# EAGLE board Adafruit PyBadge (EAGLE 9.3.1)
REV: F
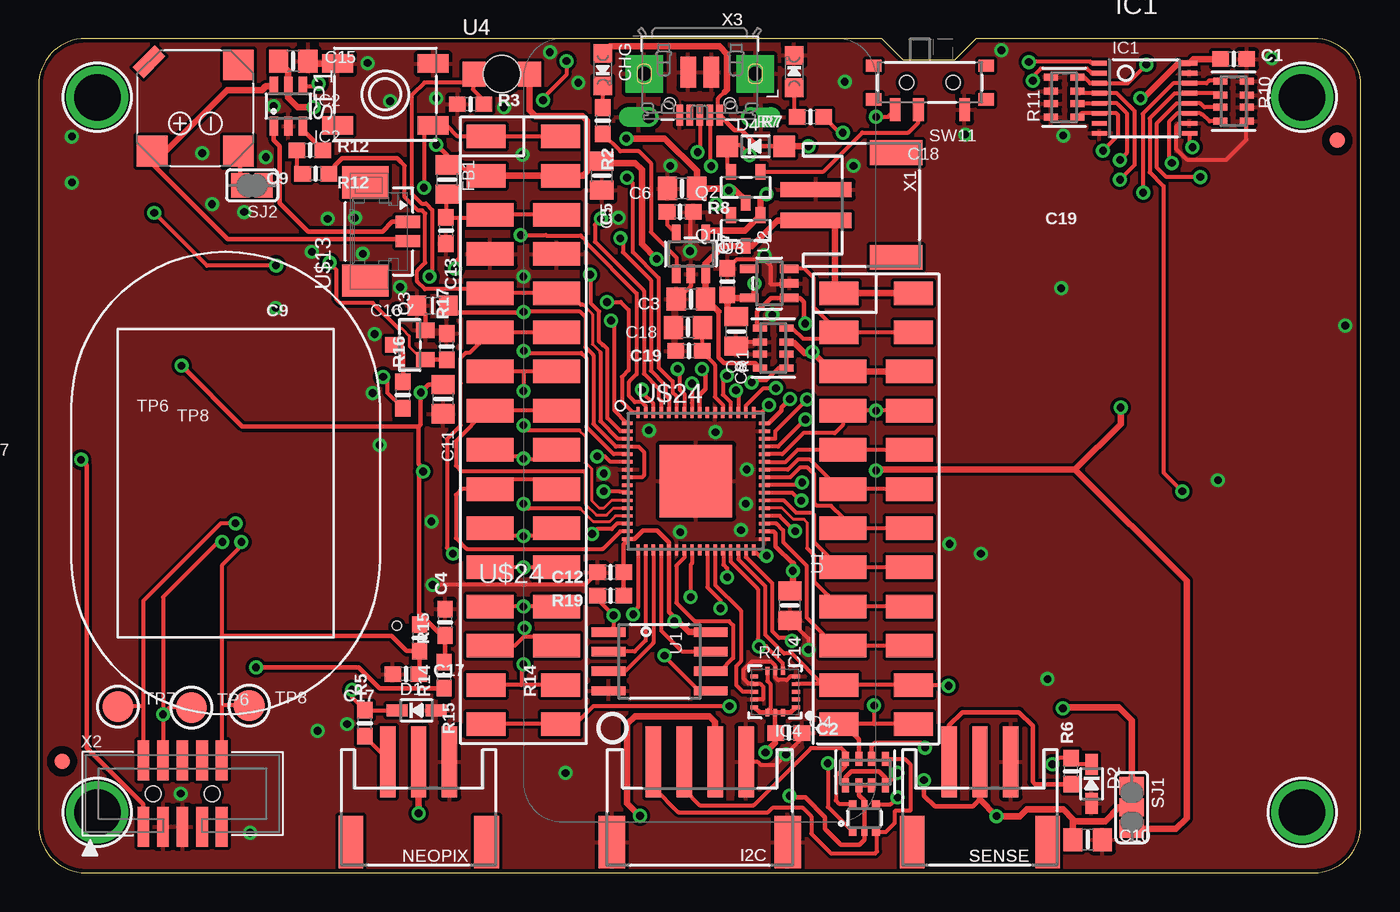
[diagram p0: board, top side]
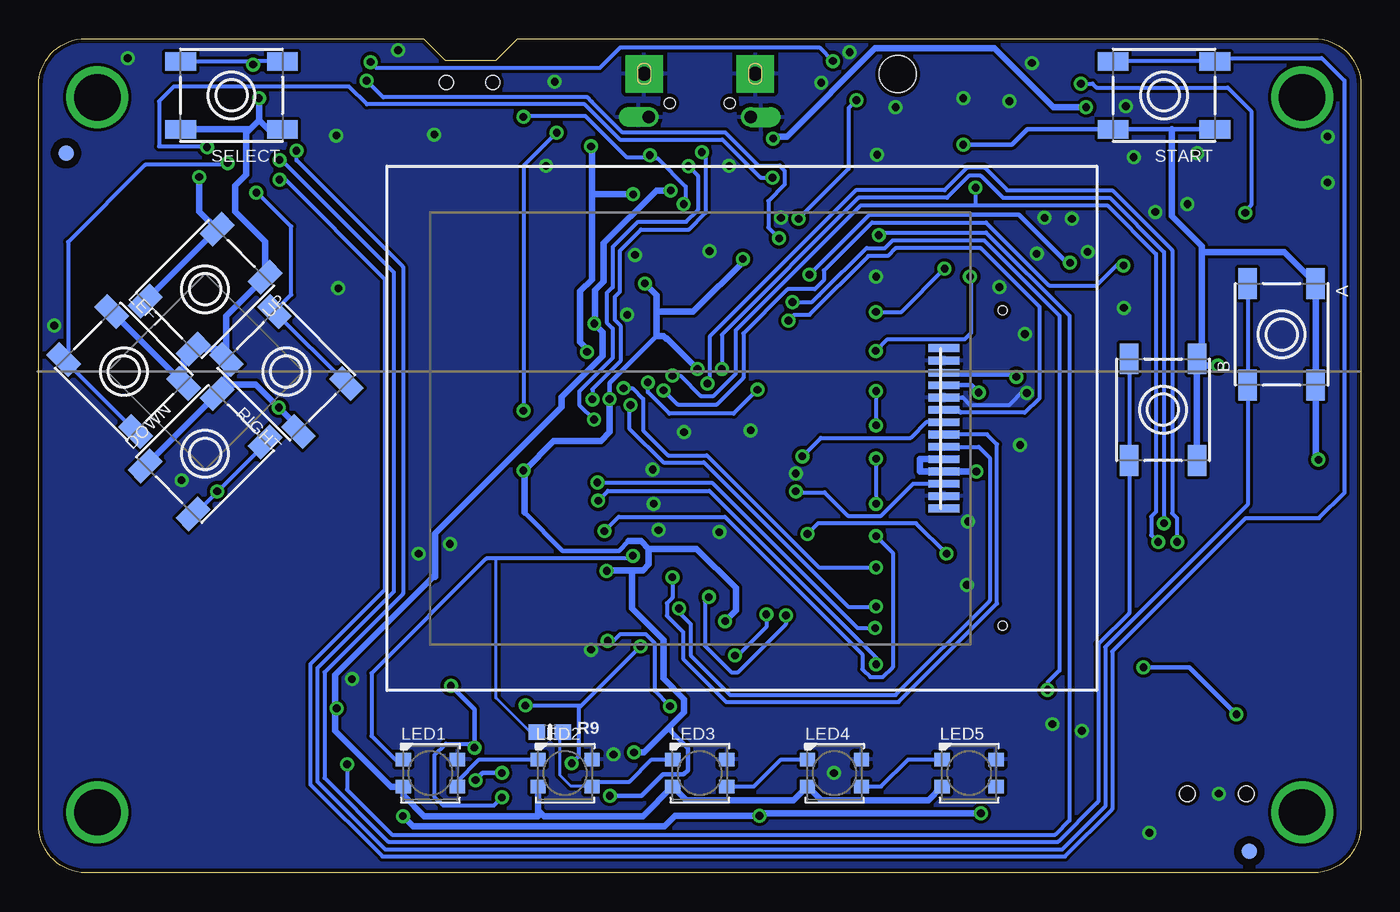
[diagram p1: board, bottom side, seen from below]

Size 85.72 x 54.1 mm. Coordinates in mm from the lower left corner, seen from the top.
Outline: 0,51.05 0,3.17 arc90 3.05,0 82.68,0 arc90 85.72,3.17 85.72,51.05 arc90 82.68,54.1 60.77,54.1 59.37,52.71 56.07,52.71 54.67,54.1 3.05,54.1 arc90 0,51.05
Copper layers (1*16): Top 0.035mm / dielectric 1.5mm / Bottom 0.035mm
Design rules "adafruit *": minimum track width 8mil, minimum drill 19mil, track to track 8mil, track to pad 8mil, pad to pad 8mil, via to via 8mil, smd to smd 8mil, copper to edge 10mil, drill to drill 8mil, minimum pad ring 10mil, minimum via ring 8mil, stop-mask expansion 2mil, vias tented up to drill 20mil, thermal gap 10mil
Net classes: 1 power: width 0.305 mm; 2 gnd: width 0.254 mm

## Footprints (pad centres in the part's own frame; a part is rotated, then mirrored left to right if it is on the bottom)
6MM_SMT = smd 2 x 1.2: A -3.3,-2.2; A' 3.3,-2.2; B -3.3,2.2; B' 3.3,2.2
0603-NO = smd 1.075 x 1: 1 -0.85,0; 2 0.85,0
0805-NO = smd 1.24 x 1.5: 1 -0.95,0; 2 0.95,0
_0805MP = smd 1.2 x 1.3: 1 -1.016,0; 2 1.016,0
CHIPLED_0805_NOOUTLINE = smd 1.2 x 1.2: A 0,-1.05; C 0,1.05
SOD-323 = smd 1.35 x 0.8: A 1.27,0; C -1.27,0
SOD-123 = smd 1.4 x 1.4: A 1.85,0; C -1.85,0
JSTPH4 = smd 1 x 4.6: 1 -3,-3.7; 2 -1,-3.7; 3 1,-3.7; 4 3,-3.7 | smd 1.7 x 3.4: NC1 -5.7,1.5; NC2 5.7,1.5
TSSOP16 = smd 0.305 x 0.991: 1 -2.275,-2.918; 2 -1.625,-2.918; 3 -0.975,-2.918; 4 -0.325,-2.918; 5 0.325,-2.918; 6 0.975,-2.918; 7 1.625,-2.918; 8 2.275,-2.918; 9 2.275,2.918; 10 1.625,2.918; 11 0.975,2.918; 12 0.325,2.918; 13 -0.325,2.918; 14 -0.975,2.918; 15 -1.625,2.918; 16 -2.275,2.918
SOT23-6 = smd 0.55 x 1.2: 1 -0.95,-1.3; 2 0,-1.3; 3 0.95,-1.3; 4 0.95,1.3; 5 0,1.3; 6 -0.95,1.3
LGA16_3X3MM = smd 0.5 x 0.25: 1 -1.35,1; 2 -1.35,0.5; 3 -1.35,0; 4 -1.35,-0.5; 5 -1.35,-1; 9 1.35,-1; 10 1.35,-0.5; 11 1.35,0; 12 1.35,0.5; 13 1.35,1 | smd 0.25 x 0.5: 6 -0.5,-1.35; 7 0,-1.35; 8 0.5,-1.35; 14 0.5,1.35; 15 0,1.35; 16 -0.5,1.35
JD-T1800 = smd 0.5 x 2: 1 5.2,-13.1; 2 4.4,-13.1; 3 3.6,-13.1; 4 2.8,-13.1; 5 2,-13.1; 6 1.2,-13.1; 7 0.4,-13.1; 8 -0.4,-13.1; 9 -1.2,-13.1; 10 -2,-13.1; 11 -2.8,-13.1; 12 -3.6,-13.1; 13 -4.4,-13.1; 14 -5.2,-13.1 | hole 0.6: -12.8,-16.9; 7.65,-16.9
LED3535 = smd 1 x 0.85: 1 -1.75,0.875; 2 -1.75,-0.875; 3 1.75,-0.875; 4 1.75,0.875
FEATHERWING_SMT_NOHOLES = smd 1.524 x 2.54: 1 6.35,2.413; 1B 6.35,-2.413; 2 8.89,2.413; 2B 8.89,-2.413; 15 41.91,2.413; 15B 41.91,-2.413; 16 44.45,2.413; 16B 44.45,-2.413; 17 44.45,20.447; 17B 44.45,25.273; 18 41.91,20.447; 18B 41.91,25.273; 27 19.05,20.447; 27B 19.05,25.273; 28 16.51,20.447; 28B 16.51,25.273 | smd 1.524 x 3.048: 3 11.43,2.159; 3B 11.43,-2.159; 4 13.97,2.159; 4B 13.97,-2.159; 5 16.51,2.159; 5B 16.51,-2.159; 6 19.05,2.159; 6B 19.05,-2.159; 7 21.59,2.159; 7B 21.59,-2.159; 8 24.13,2.159; 8B 24.13,-2.159; 9 26.67,2.159; 9B 26.67,-2.159; 10 29.21,2.159; 10B 29.21,-2.159; 11 31.75,2.159; 11B 31.75,-2.159; 12 34.29,2.159; 12B 34.29,-2.159; 13 36.83,2.159; 13B 36.83,-2.159; 14 39.37,2.159; 14B 39.37,-2.159; 19 39.37,20.701; 19B 39.37,25.019; 20 36.83,20.701; 20B 36.83,25.019; 21 34.29,20.701; 21B 34.29,25.019; 22 31.75,20.701; 22B 31.75,25.019; 23 29.21,20.701; 23B 29.21,25.019; 24 26.67,20.701; 24B 26.67,25.019; 25 24.13,20.701; 25B 24.13,25.019; 26 21.59,20.701; 26B 21.59,25.019
JSTPH3 = smd 1 x 4.6: 1 -2,-2.7; 2 0,-2.7; 3 2,-2.7 | smd 1.6 x 3.4: NC1 -4.4,2.5; NC2 4.4,2.5
SOT23-R = smd 0.635 x 1.016: 1 -0.95,-1; 2 0.95,-1; 3 0,1
SOT23-WIDE = smd 1 x 1.2: 1 -0.95,-1; 2 0.95,-1; 3 0,1
SOT363 = smd 0.5 x 0.5: 1 -0.75,-0.9; 3 0.75,-0.9; 4 0.75,0.9; 6 -0.75,0.9 | smd 0.4 x 0.5: 2 0,-0.9; 5 0,0.9
RESPACK_4X0603 = smd 0.45 x 0.9: 1 -1.3,-0.85; 2 -0.4,-0.85; 3 0.4,-0.85; 4 1.3,-0.85; 5 1.3,0.85; 6 0.4,0.85; 7 -0.4,0.85; 8 -1.3,0.85
SOLDERJUMPER_2WAY_OPEN_NOPASTE = smd 1.168 x 1.6: 1 -1.397,0; 2 0,0; 3 1.397,0
SOLDERJUMPER_CLOSEDWIRE = smd 1.168 x 1.6: 1 -0.762,0; 2 0.762,0 | smd 0.635 x 0.203: WIRE 0,0
BUZZER_SMT_7.5MM = smd 2 x 2: + 2.8,-2.8; - 2.8,2.8; MT2 -2.8,2.8 | smd 2 x 1 rotated 135: MT -3,-3
EVQ-Q2_SMALLER = smd 2 x 1.2: A -3.1,-2; A' 3.1,-2; B -3.1,2; B' 3.1,2
SPDT_SMT_SSSS811101 = smd 0.7 x 1.5: A -2.25,1.75; B 0.75,1.75; C 2.25,1.75 | smd 1 x 0.8: SUP1 -3.65,1.1; SUP2 -3.65,-1.1; SUP3 3.65,1.1; SUP4 3.65,-1.1 | hole 0.9: -1.5,0; 1.5,0
TESTPOINT_ROUND_2MM = smd 2 x 2: P$1 0,0
SOIC8_208MIL = smd 0.6 x 2.2: 1 -1.905,-3.315; 2 -0.635,-3.315; 3 0.635,-3.315; 4 1.905,-3.315; 5 1.905,3.315; 6 0.635,3.315; 7 -0.635,3.315; 8 -1.905,3.315
SOT23-5 = smd 0.55 x 1.2: 1 -0.95,-1.3; 2 0,-1.3; 3 0.95,-1.3; 4 0.95,1.3; 5 -0.95,1.3
ALS-PT26-21C = smd 1.5 x 1.6: 1_E -1.8,0; 2_C 1.8,0 | hole 2.4: 0,0
MOUNTINGHOLE_3.0_PLATEDTHIN = drill 3 pad 3.6: P$1 0,0
53398-0271 = smd 0.8 x 1.6: 1 0.625,-1.27; 2 -0.625,-1.27 | smd 2.1 x 3: M1 3.185,1.48; M2 -3.185,1.48
PQFN64-1 = smd 0.7 x 0.22: 1 -4.45,3.75; 2 -4.45,3.25; 3 -4.45,2.75; 4 -4.45,2.25; 5 -4.45,1.75; 6 -4.45,1.25; 7 -4.45,0.75; 8 -4.45,0.25; 9 -4.45,-0.25; 10 -4.45,-0.75; 11 -4.45,-1.25; 12 -4.45,-1.75; 13 -4.45,-2.25; 14 -4.45,-2.75; 15 -4.45,-3.25; 16 -4.45,-3.75; 33 4.45,-3.75; 34 4.45,-3.25; 35 4.45,-2.75; 36 4.45,-2.25; 37 4.45,-1.75; 38 4.45,-1.25; 39 4.45,-0.75; 40 4.45,-0.25; 41 4.45,0.25; 42 4.45,0.75; 43 4.45,1.25; 44 4.45,1.75; 45 4.45,2.25; 46 4.45,2.75; 47 4.45,3.25; 48 4.45,3.75 | smd 0.22 x 0.7: 17 -3.75,-4.45; 18 -3.25,-4.45; 19 -2.75,-4.45; 20 -2.25,-4.45; 21 -1.75,-4.45; 22 -1.25,-4.45; 23 -0.75,-4.45; 24 -0.25,-4.45; 25 0.25,-4.45; 26 0.75,-4.45; 27 1.25,-4.45; 28 1.75,-4.45; 29 2.25,-4.45; 30 2.75,-4.45; 31 3.25,-4.45; 32 3.75,-4.45; 49 3.75,4.45; 50 3.25,4.45; 51 2.75,4.45; 52 2.25,4.45; 53 1.75,4.45; 54 1.25,4.45; 55 0.75,4.45; 56 0.25,4.45; 57 -0.25,4.45; 58 -0.75,4.45; 59 -1.25,4.45; 60 -1.75,4.45; 61 -2.25,4.45; 62 -2.75,4.45; 63 -3.25,4.45; 64 -3.75,4.45 | smd 4.7 x 4.7: EXP 0,0
FIDUCIAL_1MM = smd 1 x 1: 1 0,0
JSTPH2 = smd 1 x 4.6: 1 -1,-3.7; 2 1,-3.7 | smd 1.6 x 3.4: NC1 -3.4,1.5; NC2 3.4,1.5
2X05_1.27MM_BOX_POSTS = smd 0.76 x 2.6: 1 -2.54,-2.15; 2 -2.54,2.15; 3 -1.27,-2.15; 4 -1.27,2.15; 5 0,-2.15; 6 0,2.15; 7 1.27,-2.15; 8 1.27,2.15; 9 2.54,-2.15; 10 2.54,2.15 | hole 1: -1.905,0; 1.905,0
4UCONN_20329_V2 = smd 1 x 2: BASE@1 -0.75,-2; BASE@2 0.75,-2 | smd 0.4 x 1.35: D+ 0,0.775; D- -0.65,0.775; GND 1.3,0.775; ID 0.65,0.775; VBUS -1.3,0.775 | drill 0.8 pad 1.143 offset: SPRT@1 -3.3,0.9; SPRT@2 3.3,0.9 | drill 0.9 pad 2.413 square: SPRT@3 -3.6,-1.9; SPRT@4 3.6,-1.9 | hole 0.7: -1.95,0; 1.95,0

## Placement (x,y rotation side)
A  [6MM_SMT]  5.14,34.93 270 bottom
B  [6MM_SMT]  12.83,30.04 270 bottom
C1  1uF  [0603-NO]  77.47,52.77 0 top
C2  1uF  [0603-NO]  48.64,9.08 0 top
C3  10µF  [0805-NO]  42.29,37.21 180 top
C4  1uF  [0603-NO]  26.35,16.26 90 top
C5  10uF  [0805-NO]  36.51,45.21 270 top
C6  10µF  [0805-NO]  41.72,44.39 180 top
C7  1uF  [0603-NO]  44.66,38.34 90 top
C8  10µF  [0805-NO]  45.23,35.12 270 top
C9  0.1uF  [0603-NO]  17.97,45.34 180 top
C10  10uF  [0805-NO]  68.01,2.16 0 top
C11  10uF  [0805-NO]  26.23,30.72 270 top
C12  1uF  [0603-NO]  37.08,19.49 180 top
C13  1uF  [0603-NO]  26.42,41.66 270 top
C14  10uF  [0805-NO]  48.7,17.34 270 top
C15  10uF  [0805-NO]  16.51,52.64 0 top
C16  10µF  [_0805MP]  25.55,36.78 180 top
C17  0.1uF  [0603-NO]  23.81,12.89 0 top
C18  10uF  [0805-NO]  42.1,35.37 180 top
C19  1uF  [0603-NO]  42.16,33.85 180 top
CHG  ORANGE  [CHIPLED_0805_NOOUTLINE]  36.58,52.07 180 top
D1  3.6V  [SOD-323]  24.51,10.54 0 top
D2  3.6V  [SOD-323]  68.26,5.78 270 top
D4  MBR0540  [SOD-123]  46.48,47.12 0 top
DOWN  [6MM_SMT]  74.93,27.18 45 bottom
FB1  Ferrite  [0805-NO]  26.48,44.96 270 top
I2C  JST PH 4  [JSTPH4]  42.86,3.49 180 top
IC1  74165TSSOP  [TSSOP16]  71.69,50.23 270 top
IC2  PAM8301  [SOT23-6]  16.19,49.72 0 top
IC4  LIS3DH  [LGA16_3X3MM]  47.75,11.75 180 top
L  RED  [CHIPLED_0805_NOOUTLINE]  48.98,51.97 0 top
LCD1  DISP_LCD_JDT1800  [JD-T1800]  40.13,28.83 90 bottom
LED1  WS2812B3535  [LED3535]  60.33,6.48 0 bottom
LED2  WS2812B3535  [LED3535]  51.59,6.48 0 bottom
LED3  WS2812B3535  [LED3535]  42.86,6.48 0 bottom
LED4  WS2812B3535  [LED3535]  34.13,6.48 0 bottom
LED5  WS2812B3535  [LED3535]  25.4,6.48 0 bottom
LEFT  [6MM_SMT]  80.2,32.51 315 bottom
MS1  FEATHERWING_SMTDUALNOHOLES  [FEATHERWING_SMT_NOHOLES]  31.43,54.1 270 top
NEOPIX  JST PH 3  [JSTPH3]  24.64,4.51 180 top
Q1  DMG3405  [SOT23-R]  45.85,41.66 180 top
Q2  DMG3405  [SOT23-R]  45.85,44.45 180 top
Q3  BSS138  [SOT23-WIDE]  24.08,34.24 90 top
Q4  BSS138  [SOT363]  53.53,3.56 0 top
R1  100K  [RESPACK_4X0603]  47.62,34.04 90 top
R2  1K  [0603-NO]  36.58,48.77 270 top
R3  10K  [0603-NO]  28,49.85 0 top
R4  10K  [RESPACK_4X0603]  53.59,6.54 0 top
R5  1K  [0603-NO]  21.15,9.72 90 top
R6  1K  [0603-NO]  66.93,6.6 90 top
R7  2.2K  [0603-NO]  50.04,49.02 180 top
R8  4.7K  [0603-NO]  41.59,42.86 0 top
R9  DNP  [0603-NO]  52.58,9.14 0 bottom
R10  100K  [RESPACK_4X0603]  77.47,50.04 270 top
R11  100K  [RESPACK_4X0603]  66.48,50.29 90 top
R12  47K  [0603-NO]  17.59,46.86 0 top
R14  10K  [0603-NO]  24.7,15.24 270 top
R15  10K  [0603-NO]  26.29,12.83 270 top
R16  10  [0603-NO]  23.62,30.99 90 top
R17  100K  [0603-NO]  26.45,34.12 90 top
R19  100K  [0603-NO]  37.08,17.97 180 top
RIGHT  [6MM_SMT]  69.66,32.51 135 bottom
SELECT  [6MM_SMT]  73.22,50.42 180 bottom
SENSE  JST PH 3  [JSTPH3]  61.02,4.51 180 top
SJ1  [SOLDERJUMPER_2WAY_OPEN_NOPASTE]  70.87,4.25 270 top
SJ2  [SOLDERJUMPER_CLOSEDWIRE]  13.84,44.58 180 top
SP1  SPEAKER_7.5MM  [BUZZER_SMT_7.5MM]  10.16,49.59 270 top
START  [6MM_SMT]  12.76,50.42 180 bottom
SW1  SPST_TACT-EVQQ2  [EVQ-Q2_SMALLER]  22.48,50.48 0 top
SW11  [SPDT_SMT_SSSS811101]  57.78,51.24 180 top
TP6  [TESTPOINT_ROUND_2MM]  9.91,10.73 0 top
TP7  [TESTPOINT_ROUND_2MM]  5.14,10.79 0 top
TP8  [TESTPOINT_ROUND_2MM]  13.65,10.86 0 top
U1  GD25Q16  [SOIC8_208MIL]  40.26,13.72 270 top
U2  AP2112-3.3  [SOT23-5]  47.37,38.23 90 top
U3  MCP73831T-2ACI/OT  [SOT23-5]  42.29,40.13 0 top
U4  ALS-PT21  [ALS-PT26-21C]  30.03,51.8 0 top
U$5  MOUNTINGHOLE3.0THIN  [MOUNTINGHOLE_3.0_PLATEDTHIN]  3.81,50.29 0 top
U$6  MOUNTINGHOLE3.0THIN  [MOUNTINGHOLE_3.0_PLATEDTHIN]  81.92,50.29 0 top
U$8  [SPEAKER_OVAL8OHM]  12.13,25.27 90 top
U$13  CON_MOLEX_2P  [53398-0271]  22.67,41.59 90 top
U$15  MOUNTINGHOLE3.0THIN  [MOUNTINGHOLE_3.0_PLATEDTHIN]  3.81,3.94 0 top
U$17  MOUNTINGHOLE3.0THIN  [MOUNTINGHOLE_3.0_PLATEDTHIN]  81.92,3.94 0 top
U$18  [PYBADGE_TOP]  85.72,0.13 0 bottom
U$24  ATSAMD51J19  [PQFN64-1]  42.61,25.4 0 top
U$32  [PYBADGE_BOT]  0,0.13 0 top
U$34  FIDUCIAL_1MM  [FIDUCIAL_1MM]  1.52,7.24 270 top
U$35  FIDUCIAL_1MM  [FIDUCIAL_1MM]  84.18,47.51 270 top
U$37  [PCBFEAT-REV-040]  37.21,9.4 0 top
U$42  FIDUCIAL_1MM  [FIDUCIAL_1MM]  83.95,46.67 0 bottom
U$43  FIDUCIAL_1MM  [FIDUCIAL_1MM]  7.24,1.4 0 bottom
UP  [6MM_SMT]  74.93,37.85 225 bottom
X1  JSTPH  [JSTPH2]  54.1,43.31 270 top
X2  2x5 0.05" SWD  [2X05_1.27MM_BOX_POSTS]  9.33,5.14 0 top
X3  microUSB  [4UCONN_20329_V2]  42.86,49.91 180 top

## Library data of the parts
A B C1-C7 C9-C19 CHG D1 D2 D4 DOWN FB1 I2C IC1 IC2 IC4 L LCD1 LED1-LED5 LEFT MS1 NEOPIX Q1-Q4 R1-R12 R14-R17 R19 RIGHT SELECT SENSE SJ1 SJ2 SP1 START SW1 SW11 TP6-TP8 U1-U4 U$8 U$13 U$24 U$37 UP X1-X3 = microbuilder
C8 = microbuilder; COMPANY: ADAFRUIT INDUSTRIES; DRAWN: KTOWN; REV: A
U$5 U$6 U$15 U$17 U$34 U$35 U$42 U$43 = microbuilder; BOM: EXCLUDE
U$18 U$32 = feather_silks

## Nets
!RESET: C17.2 MS1.1 MS1.1B R14.2 SW1.A' TP8.P$1 U$24.52 X2.10
+3V3 [power]: A.B A.B' B.B B.B' C1.1 C2.1 C4.1 C5.1 C7.1 C8.1 C11.1 C12.1 C14.1 DOWN.B DOWN.B' FB1.1 IC1.16 IC4.1 IC4.8 IC4.13 IC4.14 IC4.15 IC4.16 LCD1.4 LCD1.10 LCD1.11 LEFT.B LEFT.B' MS1.2 MS1.2B Q4.2 Q4.5 R4.2 R4.3 R14.1 R15.1 R19.1 RIGHT.B RIGHT.B' SELECT.B SELECT.B' SJ1.3 START.B START.B' U1.8 U2.5 U4.2_C U$24.16 U$24.21 U$24.34 U$24.48 U$24.56 UP.B UP.B' X2.1
A0: C9.1 MS1.5 MS1.5B U$24.3
A1: MS1.6 MS1.6B U$24.14
A2: MS1.7 MS1.7B U$24.11
A3: MS1.8 MS1.8B U$24.12
A4: MS1.9 MS1.9B U$24.13
A5: MS1.10 MS1.10B U$24.15
A6_VMEAS: R1.1 R1.2 U$24.62
A7_LIGHT: R3.2 U4.1_E U$24.5
AVCC: C13.1 C16.1 FB1.2 MS1.3 MS1.3B U$24.4 U$24.8
BUTTON0: IC1.11 LEFT.A LEFT.A' R10.4
BUTTON1: IC1.12 R10.3 UP.A UP.A'
BUTTON2: DOWN.A DOWN.A' IC1.13 R10.2
BUTTON3: IC1.14 R10.1 RIGHT.A RIGHT.A'
BUTTON4: IC1.3 R11.4 SELECT.A SELECT.A'
BUTTON5: IC1.4 R11.3 START.A START.A'
BUTTON6: A.A A.A' IC1.5 R11.2
BUTTON7: B.A B.A' IC1.6 R11.1
BUTTON_CLK: IC1.2 U$24.60
BUTTON_LATCH: IC1.1 U$24.61
BUTTON_OUT: IC1.9 U$24.59
CHG_LED: R2.2 U3.1
CHG_RATE: R8.1 U3.5
D2_: NEOPIX.3 R5.1
D2_A8: D1.C R5.2 U$24.64
D3_: R6.1 SENSE.3
D3_A9: D2.C R6.2 U$24.63
D4: MS1.16 MS1.16B U$24.31
D5: MS1.19 MS1.19B U$24.35
D6: MS1.20 MS1.20B U$24.37
D7_LISIRQ: IC4.11 U$24.27
D8_NEOPIX: LED1.1 R9.1 U$24.32
D9: MS1.21 MS1.21B U$24.38
D10: MS1.22 MS1.22B U$24.41
D11: MS1.23 MS1.23B U$24.42
D12: MS1.24 MS1.24B U$24.43
D13: MS1.25 MS1.25B R7.1 U$24.44
D+: U$24.46 X3.D+
D-: U$24.45 X3.D-
EN: MS1.27 MS1.27B R1.4 U2.3
GND: C1.2 C2.2 C3.2 C4.2 C5.2 C6.2 C7.2 C8.2 C10.2 C11.2 C12.2 C13.2 C14.2 C15.2 C16.2 C17.1 C18.2 C19.2 D1.A D2.A I2C.1 I2C.NC1 I2C.NC2 IC1.8 IC1.10 IC1.15 IC2.2 IC4.5 IC4.7 IC4.10 IC4.12 L.C LCD1.2 LCD1.5 LCD1.13 LED1.4 LED2.4 LED3.4 LED4.4 LED5.4 MS1.4 MS1.4B NEOPIX.1 Q3.2 R1.6 R1.7 R3.1 R8.2 R10.5 R10.6 R10.7 R10.8 R11.5 R11.6 R11.7 R11.8 R17.2 SENSE.1 SW1.B SW1.B' SW11.A U1.4 U2.2 U3.2 U$24.7 U$24.22 U$24.33 U$24.47 U$24.54 U$24.EXP X1.1 X2.3 X2.5 X3.BASE@1 X3.BASE@2 X3.GND X3.SPRT@1 X3.SPRT@2 X3.SPRT@3 X3.SPRT@4
LEDK: LCD1.3 R16.1
MISO: MS1.13 MS1.13B U$24.49
MOSI: MS1.12 MS1.12B U$24.50
N$1: CHG.C R2.1
N$2: L.A R7.2
N$3: LED1.3 LED2.1
N$4: LED2.3 LED3.1 R9.2
N$5: LED3.3 LED4.1
N$6: Q3.3 R16.2
N$7: LED4.3 LED5.1
N$8: D4.C Q1.2 Q2.2 SW11.C
N$9: C9.2 R12.1
N$10: IC2.3 R12.2
N$12: SJ2.2 SP1.-
ON/OFF: Q2.1 SW11.B
QSPI_CS: R19.2 U1.1 U$24.24
QSPI_DATA[0]: U1.5 U$24.17
QSPI_DATA[1]: U1.2 U$24.18
QSPI_DATA[2]: U1.3 U$24.19
QSPI_DATA[3]: U1.7 U$24.20
QSPI_SCK: U1.6 U$24.23
RX: MS1.14 MS1.14B U$24.40
SCK: MS1.11 MS1.11B U$24.36
SCL: I2C.4 Q4.3 R4.5
SCL_3V: IC4.4 MS1.18 MS1.18B Q4.4 R4.6 U$24.30
SDA: I2C.3 Q4.6 R4.8
SDA_3V: IC4.6 MS1.17 MS1.17B Q4.1 R4.7 U$24.29
SPKR+: IC2.1 SJ2.1 U$13.1
SPKR-: IC2.6 SP1.+ U$13.2
SPKR_EN: IC2.4 U$24.51
SWCLK: R15.2 TP6.P$1 U$24.57 X2.4
SWDIO: TP7.P$1 U$24.58 X2.2
TFT_CS: LCD1.12 U$24.10
TFT_DC: LCD1.7 U$24.6
TFT_LITE: Q3.1 R17.1 U$24.2
TFT_MOSI: LCD1.8 U$24.28
TFT_RST: LCD1.6 U$24.1
TFT_SCK: LCD1.9 U$24.26
TX: MS1.15 MS1.15B U$24.39
V+ [power]: C6.1 C15.1 IC2.5 LED1.2 LED2.2 LED3.2 LED4.2 LED5.2 Q2.3 R1.5 SJ1.1 U2.1
VBAT [power]: C3.1 MS1.28 MS1.28B Q1.3 R1.8 U3.3 X1.2
VBUS: CHG.A D4.A MS1.26 MS1.26B Q1.1 R1.3 U3.4 X3.VBUS
VCC [power]: C10.1 I2C.2 NEOPIX.2 R4.1 R4.4 SENSE.2 SJ1.2
VDDCORE2: C18.1 C19.1 U$24.53

## Tracks (layer width: path | path; a pad name or v marks a point on that pad's centre or on a via)
!RESET  (via drill 0.5)
  Top 0.254: v44.62,32.24 44.37,31.99 44.37,31.01 44.86,30.52 U$24.52 | 11.87,10.86 11.87,15.37 11.87,19.93 13.14,21.2 v13.14,21.46 | TP8.P$1 11.87,10.86 | MS1.1 MS1.1B 27.18,47.75 26.45,48.48 SW1.A' 24.98,47.88 v24.98,44.43 | 11.87,10.86 X2.10
  Top 0.305: C17.2 24.7,12.93 R14.2 23.87,14.39 22.89,15.37 11.87,15.37
  Bottom 0.254: v44.62,32.24 44.12,32.24 42.8,30.92 41.96,30.92 40.53,32.35 40.53,35.16 32.4,43.29 25.02,43.29 | v13.14,21.46 13.59,21.91 13.59,23.11 13.28,23.42 13.28,40.13 16.45,43.29 25.02,43.29 | v24.98,44.43 24.98,43.33 25.02,43.29
+3V3  (via drill 0.5)
  Top 0.254: IC4.8 47.25,12.45 47.45,12.25 47.45,10.66
  Top 0.305: 41.4,16.38 41.34,16.45 | 41.34,16.45 40.86,16.93 U$24.21 40.86,21.43 40.09,22.21 39.18,22.21 38.64,21.67 38.18,21.67 U$24.16 38.16,21.52 37.93,21.3 C12.1 R19.1 | U$24.34 47.64,22.15 47.78,22.01 47.78,21.18 48.9,20.06 | IC4.15 IC4.14 47.18,10.4 | IC4.15 IC4.16 48.75,10.4 IC4.1 | IC4.13 46.75,10.4 47.18,10.4 | 41.34,16.45 v41.21,16.32 | IC4.15 47.75,9.04 | 47.75,9.04 47.75,8.45 | U$24.56 42.86,30.99 43.24,31.37 43.24,32.45 v43.02,32.67 | 47.45,10.66 47.18,10.4 | C2.1 47.75,9.04 | X2.1 6.79,4.44 3.11,8.13 3.11,26.44 v2.75,26.8 | R4.3 R4.2 53.19,5.04 53.53,4.71 Q4.5 Q4.2 53.53,2.16 53.21,1.84 52.01,1.84 50.99,2.86 50.99,3.62 49.72,4.89 48.83,4.89 48.72,5 v48.69,5 | R15.1 26.35,13.74 C4.1 26.12,15.41 25.07,16.46 | v48.7,30.73 48.16,30.19 48.16,30 47.31,29.15 U$24.48 | 25.07,16.46 24.66,16.87 24.66,25.76 v24.93,26.04 | v9.27,32.89 13.21,28.96 24.64,28.96 | 25.07,16.46 R14.1 | MS1.2B 28.07,45.21 27.37,45.91 FB1.1 26.48,46.53 v25.78,47.23 | 24.64,28.96 24.75,29.07 24.75,31.13 v24.78,31.15 25.3,31.67 C11.1 | 24.64,28.96 24.64,26.5 25.02,26.12
  Top 0.406: C8.1 44.66,36.64 C7.1 44.87,37.28 U2.5 46.42,37.28 v46.42,38.23 | MS1.2B MS1.2 35.31,45.21 35.56,45.47 35.56,46.16 | 41.4,16.38 42.16,15.62 U1.8 | 35.56,46.16 35.56,48.76 35.26,49.06 32.22,49.06 31.83,49.45 U4.2_C | 35.56,46.16 C5.1 36.64,46.04 38.67,46.04 39.12,45.59 39.12,40.77 v40.07,39.82 | v71.44,50.23 71.63,50.23 73.9,52.5 IC1.16 74.87,52.77 C1.1 | 47.75,8.45 v47.12,7.81 | v54.29,26.1 54.34,26.15 67.19,26.15 | 25.02,26.12 v24.93,26.04 | 67.19,26.15 70.15,29.11 v70.15,30.18 | C14.1 48.9,18.48 v48.9,19.58 v48.9,19.59 48.9,20.06 | SJ1.3 73.72,2.86 74.42,3.56 74.42,18.92 67.19,26.15
  Bottom 0.305: v48.7,30.73 48.7,31.75 45.66,34.8 | 54.23,23.37 51.75,20.89 48.11,20.89 47.47,21.53 | v48.69,5 46.65,5 45.26,6.38 43.91,6.38 43.62,6.67 43.62,8.06 44.93,9.37 | START.B 12.26,48.22 START.B' 21.63,48.22 22.62,47.23 v25.78,47.23 | LCD1.4 25.25,31.63 v24.78,31.15
  Bottom 0.406: v40.07,39.82 39.88,39.82 43.31,36.39 45.66,36.39 | 45.66,36.39 45.66,34.8 45.2,34.8 45.05,34.64 44.98,34.64 v43.02,32.67 | v46.42,38.23 45.66,37.47 45.66,36.39 | v47.12,7.81 46.48,7.81 44.93,9.37 43.88,10.42 43.88,11.26 45.22,12.61 45.22,15.11 47.24,17.14 47.24,19.63 | 54.23,26.1 52.32,28 49.28,28 48.7,28.57 v48.7,30.73 | v54.29,26.1 54.23,26.1 | 54.23,26.1 54.23,23.37 | LCD1.10 28.57,26.83 28.57,26.04 LCD1.11 v24.94,26.03 v24.93,26.04 | 47.24,19.63 46.54,19.63 46.17,20 46.17,21.02 | 46.17,21.02 43.06,21.02 40.51,18.48 40.51,17.02 v41.21,16.32 | DOWN.B DOWN.B' 73.55,31.67 | LEFT.B LEFT.B' 76.31,33.35 UP.B' 74.22,33.96 RIGHT.B' | 47.47,21.53 46.67,21.53 46.17,21.02 | 47.24,19.63 48.85,19.63 v48.9,19.58 | v71.44,50.23 71.44,48.8 | 12.26,48.22 12.26,42.58 10.32,40.64 10.32,40.26 | 71.44,48.8 72.02,48.22 | 72.02,48.22 SELECT.B' | 71.44,48.8 70.86,48.22 SELECT.B | 72.02,48.22 72.26,47.98 72.26,45.28 72.97,44.57 72.97,42.87 71.04,40.94 UP.B 73.55,36.12 RIGHT.B' | v2.75,26.8 2.94,26.99 A.B' A.B 4.98,40.26 10.32,40.26 | RIGHT.B' 73.55,31.67 | 73.55,31.67 71.65,31.67 v70.15,30.18 68.88,28.91 RIGHT.B | 10.32,40.26 10.32,33.64 B.B | B.B' B.B | B.B 10.18,32.89 v9.27,32.89
A0
  Top 0.203: 35.29,36.84 35.9,36.23 35.9,34.29 36.42,33.77
  Top 0.254: U$24.3 37.57,28.15 36.42,29.3 36.42,33.77 | 35.29,36.84 35.17,36.84 34.42,37.59 MS1.5 MS1.5B 29.02,37.85 25.05,37.85 24.55,38.35 24.55,39.05 25.07,39.57 25.07,42.75 24.88,42.95 24.62,42.95 23.74,43.82 23.74,45.86 23.5,46.1
  Top 0.305: C9.1 19.2,45.72 19.2,45.87 19.68,46.36 23.24,46.36 23.5,46.1
A1  (via drill 0.5)
  Top 0.254: MS1.6 MS1.6B 27.94,33.72 27.69,33.72 27.37,33.4 27.37,31.75 27.37,29.02 26.48,28.13 26.48,21.08 v26.86,20.7 | U$24.14 37.51,22.65 37.15,22.29 36.2,22.29 v35.88,21.98
  Bottom 0.254: v26.86,20.7 28.84,22.67 35.19,22.67 v35.88,21.98
A2  (via drill 0.5)
  Top 0.203: U$24.11 37.14,24.15 36.63,23.64 36.37,23.64 35.85,24.15 35.85,26.21 35.46,26.6 35.46,28.3 35.05,28.7
  Top 0.254: 31.43,32.51 MS1.7B | MS1.7 31.43,32.51 | 35.05,28.7 31.75,28.7 v31.43,29.02 | 31.43,32.51 v31.43,31.24
  Bottom 0.254: v31.43,31.24 v31.43,29.02
A3
  Top 0.203: U$24.12 37.27,23.65 36.83,23.21 36.16,23.21 35.43,23.93 35.43,25.91 35.31,26.04
  Top 0.254: MS1.8 MS1.8B 29.02,29.97 27.05,28 27.05,26.42 27.43,26.04 35.31,26.04
A4  (via drill 0.5)
  Top 0.203: 35.12,23.62 35.97,22.77 37.02,22.77 37.4,23.15 U$24.13
  Top 0.254: MS1.9 32.96,26.8 31.5,26.8 v31.43,26.86 31.43,26.99 29.72,26.99 MS1.9B | 35.12,23.62 31.75,23.62 v31.43,23.94
  Bottom 0.254: v31.43,26.86 v31.43,23.94
A5
  Top 0.254: MS1.10 32.96,25.53 29.91,25.53 MS1.10B 27.43,24.89 27.05,24.51 27.05,21.72 27.75,21.02 36.58,21.02 37.71,22.15 U$24.15
A6_VMEAS  (via drill 0.5)
  Top 0.254: R1.2 R1.1 47.97,32.74 47.17,31.94 46.35,31.94 v46.23,31.81 | U$24.62 39.86,30.42 39.12,31.16 v39.12,31.34
  Bottom 0.254: v39.12,31.34 40.67,29.78 44.83,29.78 46.23,31.18 v46.23,31.81
A7_LIGHT  (via drill 0.5)
  Top 0.254: U$24.5 37.28,27.15 35.51,28.92 35.51,33.39 35.18,33.72 31.58,33.72 v31.45,33.85 | R3.2 28.85,50.1 28.16,50.79 28.16,51.73 U4.1_E 27.68,51.24 25.02,51.24 24.2,50.42 24.2,44.04 24.83,43.41 25.11,43.41 25.53,42.99 25.53,38.86 v25.34,38.67
  Bottom 0.254: v25.34,38.67 25.27,38.61 25.27,35.01 25.68,34.61 30.69,34.61 v31.45,33.85
AVCC  (via drill 0.5)
  Top 0.254: MS1.3 MS1.3B 29.11,42.51 27.3,42.51 C13.1 26.42,43.95 FB1.2 | v31.44,36.38 v31.43,36.39 35.1,36.39 35.45,36.04 35.45,34.1 35.97,33.58 35.97,29.11 37.43,27.65 U$24.4 38.9,27.65 39.24,27.3 39.24,25.78 39.12,25.65 U$24.8
  Top 0.305: v26.99,39.18 26.99,39.56 27.3,39.88 27.3,42.51 | v31.43,36.39 31.37,36.32 27.03,36.32 C16.1
  Bottom 0.254: v31.44,36.38 29.79,36.38 v26.99,39.18
BUTTON0  (via drill 0.5)
  Top 0.254: v73.47,46.04 73.28,46.23 73.28,48.71 73.83,49.25 IC1.11 75.32,49.25 75.39,49.18 75.47,49.18 75.91,48.74 R10.4
  Bottom 0.254: v73.47,46.04 73.47,45.91 78.8,45.91 83.81,40.91 83.81,33.57 LEFT.A LEFT.A'
BUTTON1  (via drill 0.5)
  Top 0.254: v75.31,45.13 73.11,45.13 72.5,45.74 72.5,48.62 73.79,49.91 IC1.12 | R10.3 75.58,49.64 75.31,49.91 IC1.12 | IC1.12
  Bottom 0.406: UP.A' UP.A 75.31,42.89 v75.31,45.13
BUTTON2  (via drill 0.5)
  Top 0.254: R10.2 76.5,50.55 IC1.13 73.67,50.55 72.04,48.92 72.04,45.43 72.92,44.54 72.92,25.98 v74.15,24.75
  Bottom 0.254: DOWN.A' 71.04,27.83 74.12,24.75 | v74.15,24.75 74.12,24.75 | DOWN.A 75.58,23.29 74.12,24.75
BUTTON3  (via drill 0.5)
  Top 0.254: R10.1 76.59,51.37 75.88,51.37 75.72,51.2 IC1.14 73.56,51.2 71.58,49.23 71.58,44.14 v71.61,44.11
  Bottom 0.254: RIGHT.A RIGHT.A' 69.34,37.5 69.34,41.91 71.55,44.11 v71.61,44.11
BUTTON4  (via drill 0.5)
  Top 0.254: R11.4 67.79,51.59 68.18,51.2 IC1.3 70.6,51.2 v71.82,52.42
  Bottom 0.254: SELECT.A 71.62,52.62 | 71.62,52.62 v71.82,52.42 | SELECT.A' 71.62,52.62
BUTTON5  (via drill 0.5)
  Top 0.254: v70.1,44.96 71.06,45.91 71.06,49.4 69.91,50.55 IC1.4 67.47,50.55 R11.3
  Bottom 0.254: v70.1,44.96 69.72,44.96 63.28,38.52 63.28,18.35 68.11,13.52 68.11,5.74 63.44,1.07 19.18,1.07 16.12,4.13 16.12,14.35 7.46,23 2.72,23 1.08,24.65 1.08,51.37 2.54,52.83 9.25,52.83 START.A START.A'
BUTTON6  (via drill 0.5)
  Top 0.254: v70.1,46.23 70.55,46.67 70.55,49.26 69.91,49.9 IC1.5 68.52,49.9 67.35,49.9 R11.2
  Bottom 0.254: A.A A.A' 7.34,23.88 16.57,14.65 16.57,4.32 19.37,1.52 63.25,1.52 67.65,5.93 67.65,13.27 62.7,18.22 62.7,38.95 69.98,46.23 v70.1,46.23
BUTTON7  (via drill 0.5)
  Top 0.254: v69,46.83 69.98,47.8 69.98,49.15 69.87,49.25 IC1.6 67.6,49.25 R11.1
  Bottom 0.254: B.A B.A' 15.03,16.84 17.03,14.84 17.03,4.62 17.11,4.55 | 17.11,4.55 19.62,2.03 63.06,2.03 67.18,6.16 67.18,13.02 62.1,18.1 62.1,39.31 69,46.21 v69,46.83 | 17.11,4.55
BUTTON_CLK  (via drill 0.5)
  Top 0.254: v64.45,51.37 64.45,51.62 64.97,52.15 67.97,52.15 68.27,51.85 IC1.2 | v37.72,41.15 37.88,40.98 37.88,40.24 39.7,38.43 39.7,32.56 40.65,31.61 40.65,30.97 40.86,30.76 U$24.60
  Bottom 0.254: v64.45,51.37 63.37,50.29 50.14,50.29 49.87,50.02 47.86,48.01 41.2,48.01 39.06,45.87 37.69,45.87 37.36,45.54 37.36,44.63 38.42,43.58 38.42,41.85 v37.72,41.15
BUTTON_LATCH  (via drill 0.5)
  Top 0.254: v36.45,42.42 36.07,42.04 36.07,40.93 39.24,37.75 39.24,32.37 40.19,31.42 40.19,30.78 40.36,30.61 U$24.61 | IC1.1 68.26,52.5 68.16,52.61 64.23,52.61 v64.2,52.58 | v32.7,50.1 32.7,50.23 34.23,51.75 v34.23,52.64
  Bottom 0.254: v36.45,42.42 33.21,45.66 33.21,49.59 v32.7,50.1 | v64.2,52.58 63.83,52.21 49.33,52.21 48.01,53.53 35.12,53.53 v34.23,52.64
BUTTON_OUT  (via drill 0.5)
  Top 0.254: v74.8,47.05 74.61,47.25 IC1.9 | U$24.59 41.36,30.91 41.1,31.16 41.1,31.87 40.2,32.78 40.2,38.58 38.53,40.24 38.53,44.7 v38.14,45.09
  Bottom 0.254: v38.14,45.09 38.92,45.09 41.39,47.55 48.05,47.55 50.33,49.83 50.33,49.84 64.44,49.84 65.62,51.01 76.94,51.01 77.92,50.04 77.92,47.12 74.87,47.12 v74.8,47.05
CHG_LED
  Top 0.254: U3.1 41.34,39.91 39.69,41.56 39.69,46.04 38.92,46.8 37.72,46.8 36.6,47.92 R2.2
CHG_RATE
  Top 0.254: R8.1 40.74,42.03 U3.5
D2_
  Top 0.254: R5.1 22.64,7.37 NEOPIX.3
D2_A8  (via drill 0.5)
  Top 0.254: U$24.64 38.54,29.85 37.81,30.58 37.81,32.16 38.25,32.6 38.25,36.51 37.74,37.02 v36.85,37.02 | v20.32,11.88 20.32,11.39 R5.2 21.17,10.54 D1.C
  Bottom 0.254: v36.85,37.02 35.58,37.02 35.15,37.45 35.13,37.45 32.05,40.53 30.86,40.51 30.35,41.02 24.44,41.02 19.55,36.13 19.55,13.13 20.32,12.36 v20.32,11.88
D3_
  Top 0.305: SENSE.3 59.02,9.56 59.88,10.41 63.56,10.41 64.45,9.53 64.45,5.91 64.6,5.75 R6.1
D3_A9  (via drill 0.5)
  Top 0.254: U$24.63 39.36,30.28 39.1,30.53 38.66,30.53 38.28,30.91 38.28,31.85 38.77,32.34 38.77,37.58 35.48,40.86 35.48,40.99 35.14,41.34 32.89,41.34 32.87,41.36 v31.26,41.36 | D2.C 67.33,7.05 R6.2 66.13,7.45 v65.72,7.05
  Bottom 0.254: v31.26,41.36 31.09,41.53 24.3,41.53 18.9,36.13 18.9,3.4 19.81,2.49 62.81,2.49 65.72,5.4 v65.72,7.05
D4  (via drill 0.5)
  Top 0.254: MS1.16B MS1.16 34.8,9.65 35.96,10.81 v44.78,10.81 | U$24.31 45.86,20.48 47.55,18.79 47.55,15.69 48,15.24 48.64,15.24 v48.83,15.05
  Bottom 0.254: v48.83,15.05 48.45,15.05 48,15.49 46.37,15.49 45.8,14.92 45.8,11.83 v44.78,10.81
D5
  Top 0.254: MS1.19B MS1.19 51.63,14.73 49.78,16.57 49.78,19.94 48.26,21.46 48.26,22.22 47.83,22.65 U$24.35
D6
  Top 0.203: U$24.37 48.19,23.65 48.92,22.92 49.62,22.92 49.82,22.72 49.82,21.07
  Top 0.254: MS1.20B MS1.20 51.92,17.27 50.28,18.91 50.28,20.62 49.82,21.07
D7_LISIRQ
  Top 0.254: IC4.11 45.66,11.75 45.21,12.19 45.21,13.4 45.53,13.72 45.53,17.02 43.86,18.69 U$24.27
D8_NEOPIX  (via drill 0.5)
  Top 0.254: U$24.32 46.87,20.43 47.01,20.57 v47.2,20.57
  Bottom 0.203: R9.1 53.87,9.14 56.07,11.34 56.07,20.38
  Bottom 0.254: v47.2,20.57 47.39,20.38 56.07,20.38 56.71,20.38 64.14,12.95 64.14,8.89 62.6,7.35 LED1.1
D9
  Top 0.254: MS1.21B MS1.21 51.92,19.81 50.28,21.45 50.28,23.24 50.17,23.36 49.12,23.36 48.33,24.15 U$24.38
D10
  Top 0.254: MS1.22B MS1.22 52.13,23.04 51.37,23.8 50.47,23.8 50.28,23.99 50.28,25.86 49.85,26.29 49.36,26.29 48.72,25.65 U$24.41
D11
  Top 0.254: MS1.23B MS1.23 51.92,24.89 50.02,26.8 49.22,26.8 48.58,26.15 U$24.42
D12
  Top 0.254: MS1.24B MS1.24 49.21,27.43 48.43,26.65 U$24.43
D13  (via drill 0.5)
  Top 0.254: MS1.25B v54.29,29.97 MS1.25 52.13,29.03 51.63,28.52 49.58,28.52 48.21,27.15 U$24.44 | v52.13,48.01 52.02,47.89 R7.1
  Bottom 0.254: v52.13,48.01 54.29,45.85 v54.29,29.97
D+  (via drill 0.5)
  Top 0.254: v42.73,46.74 42.86,46.87 X3.D+ | v49.83,30.71 47.74,28.62 47.74,28.15 U$24.46
  Bottom 0.254: v42.73,46.74 42.48,46.48 42.48,42.8 43.56,41.72 46.67,41.72 48.06,40.34 48.06,37.67 48.39,37.34 48.39,35.88 48.01,35.5 48.01,33.19 49.83,31.37 v49.83,30.71
D-  (via drill 0.5)
  Top 0.254: v49.72,29.4 49.7,29.4 47.95,27.65 U$24.45 | X3.D- 43.51,45.91 v43.6,45.82
  Bottom 0.254: v43.6,45.82 42.99,45.21 42.99,42.99 43.75,42.23 46.86,42.23 48.51,40.58 48.51,37.97 48.9,37.59 48.9,35.69 48.51,35.31 48.51,33.39 50.67,31.23 50.67,30.35 v49.72,29.4
EN
  Top 0.254: MS1.27 51.47,34.64 49.55,34.64 48.86,35.34 R1.4 | U2.3 49.66,39.18 50.23,38.61 50.23,36.7 MS1.27 | MS1.27B MS1.27
GND  (via drill 0.5)
  Top 0.254: IC4.12 46.93,11.25 46.99,11.3 46.99,12.07 46.81,12.25 IC4.10 46.36,12.29 46.02,12.29 45.67,12.64 45.67,13.15 46.2,13.68 47.51,13.68 47.77,13.42 47.77,13.12 IC4.7 47.75,12.7 47.94,12.52 48.51,12.52 48.74,12.75 IC4.5 | R8.2 42.23,42.86 v42.23,40.32 | C3.2 41.47,37.21 42.29,38.04 42.29,38.1 | 42.29,38.1 | U3.2 42.29,38.1 | C7.2 45.25,39.78 47.02,39.78 47.43,39.37 47.43,38.23 47.5,38.16 48.61,38.16 U2.2 | R1.6 45.49,34.44 C8.2 | IC1.10 73.94,48.6 73.74,48.4 73.74,46.98 74.49,46.23 76.96,46.23 78.3,47.56 78.3,48.71 R10.5 | C12.2 36.23,19.47 35.43,18.67 25.72,18.67 25.55,18.5 v25.55,18.67 | I2C.1 46.63,7.19 46.79,7.03 47.79,7.03 v48.45,7.68 49.49,8.72 C2.2 | C14.2 49.91,15.18 v49.91,14.48
  Top 0.305: C16.2 25.08,36.24 Q3.2
  Top 0.406: C15.2 17.62,52.48 SW1.B
  Bottom 0.254: LCD1.5 25.81,30.83 25.34,30.35 22.8,30.35 21.84,31.3 v21.65,31.11
  other vias: 37.59,42.48 40.96,45.85 31.43,38.67 25.46,22.8 47.05,40.07 43.88,28.57 39.56,28.7 41.59,22.1 45.53,22.22 45.85,23.94 45.91,26.16 34.99,51.24 33.15,53.21 47.56,36.2 21.34,52.51 9.21,5.14 20,9.65 13.72,2.6 18.1,9.21 22.1,27.75 22.8,50.04 25.78,50.23 59.05,21.34 61.09,20.7 65.41,12.57 34.16,6.48 2.16,44.77 2.16,47.75 13.34,42.86 10.6,46.67 52.83,45.85 52.26,51.31 60.07,47.88 62.42,53.34 79.95,52.83 66.42,47.82 15.24,49.72 15.37,36.64 18.73,42.42 30.16,49.66 21.78,34.94 31.37,46.57 20.51,42.48 11.24,43.37 36.64,25.91 23.43,37.99 17.72,40.27 21.02,40.14 66.29,37.91 84.71,35.5 76.45,25.46 14.73,46.42
  pour Top: 0,54.1 85.72,54.1 85.72,0.13 0,0.13
  pour Bottom: 0,54.1 85.72,54.1 85.72,0.13 0,0.13
LEDK  (via drill 0.5)
  Top 0.254: R16.1 22.61,31.15 22.61,31.9 v22.34,32.16
  Bottom 0.254: v22.34,32.16 22.48,32.3 26.91,32.3 LCD1.3
MISO  (via drill 0.5)
  Top 0.254: MS1.13B v31.43,17.27 MS1.13 | v47.35,30.33 46.87,29.85 U$24.49
  Bottom 0.254: v47.35,30.33 47.43,30.25 47.43,28.83 45.23,26.62 42.6,26.62 33.23,17.25 31.45,17.25 v31.43,17.27
MOSI  (via drill 0.5)
  Top 0.254: MS1.12B v31.43,19.81 MS1.12 | v47.8,31.43 47,31.43 45.86,30.29 U$24.50
  Bottom 0.254: v47.8,31.43 47.23,31.43 46.53,30.74 46.53,28.69 44.92,27.08 42.41,27.08 35.14,19.81 v31.43,19.81
N$1
  Top 0.254: CHG.C R2.1
N$2
  Top 0.254: L.A 48.98,50.1 48.98,49.23 R7.2
N$3
  Bottom 0.254: LED2.1 57.16,7.35 58.58,5.94 LED1.3
N$4
  Bottom 0.203: LED2.3 49.89,5.65 51.24,5.65 51.94,6.35 51.94,8.93 R9.2
  Bottom 0.254: LED2.3 49.53,5.92 47.42,5.92 45.97,7.37 44.63,7.37 LED3.1
N$5
  Bottom 0.254: LED3.3 39.36,5.6 37.59,7.37 35.9,7.37 LED4.1
N$6
  Top 0.305: Q3.3 23.62,33.7 R16.2
N$7
  Bottom 0.254: LED4.3 31.1,5.6 29.34,7.37 27.16,7.37 LED5.1
N$8  (via drill 0.5)
  Top 0.254: Q2.2 44.63,45.72 D4.C 44.7,47.18 45.47,47.18 v46.1,46.55 | Q1.2 44.83,42.66 44.12,43.37 v43.9,43.37 | v54.29,49.02 55.06,49.02 SW11.C
  Bottom 0.254: v43.9,43.37 43.9,43.5 43.77,43.62 43.77,44.51 45.59,46.33 45.89,46.33 v46.1,46.55 46.23,46.42 47.62,46.42 50.29,49.09 54.29,49.09 v54.29,49.02
N$9
  Top 0.254: R12.1 16.74,45.72 C9.2
N$10
  Top 0.305: IC2.3 17.14,48.16 R12.2
N$11
  Top 0.254: 70.87,5.46 70.87,4.44
N$12
  Top 0.305: SP1.- 13.08,46.67 SJ2.2
ON/OFF
  Top 0.254: Q2.1 50.85,45.45 53.4,48.01 56.39,48.01 57.03,48.65 SW11.B
QSPI_CS  (via drill 0.5)
  Top 0.254: U1.1 37.27,15.95 v37.27,16.7 36.23,17.74 R19.2 | U$24.24 42.36,20.07 42.27,19.98 v42.27,17.89
  Bottom 0.254: v37.27,16.7 37.27,16.13 40.39,13.02 40.82,13.02 42.53,14.73 42.53,17.63 v42.27,17.89
QSPI_DATA[0]  (via drill 0.5)
  Top 0.254: U$24.17 38.86,17.2 38.61,16.95 38.61,16.83 v38.54,16.76 | U1.5 42.8,11.81 40.58,14.03 v40.58,14.1
  Bottom 0.254: v38.54,16.76 38.54,15.94 40.39,14.1 v40.58,14.1
QSPI_DATA[1]
  Top 0.254: U1.2 38.64,14.35 39.36,15.07 U$24.18
QSPI_DATA[2]
  Top 0.254: U$24.19 39.86,14.92 38.02,13.08 U1.3
QSPI_DATA[3]
  Top 0.254: U1.7 41.72,14.35 40.36,15.71 U$24.20
QSPI_SCK
  Top 0.254: U$24.23 41.86,20.44 41.35,19.93 41.35,17.51 42.55,16.32 44.77,16.32 45.02,16.07 45.02,13.93 44.17,13.08 U1.6
RX  (via drill 0.5)
  Top 0.254: MS1.14B 30.86,14.73 31.43,15.3 | MS1.14 33.02,15.3 31.43,15.3 | U$24.40 49.34,25.15 v49.5,25.31 | v31.5,15.88 31.5,15.37 31.43,15.3
  Bottom 0.254: v49.5,25.31 42.08,25.31 32.64,15.88 v31.5,15.88
SCK  (via drill 0.5)
  Top 0.254: MS1.11B 29.78,21.84 v31.43,21.84 33.08,21.84 MS1.11 | U$24.36 48.03,23.15 49.02,22.16 v49.05,22.16
  Bottom 0.254: v31.43,21.84 30.35,20.76 30.35,13.34 30.99,12.7 31.81,12.7 32.32,13.21 32.32,14.18 41.23,23.09 48.12,23.09 v49.05,22.16
SCL
  Top 0.254: I2C.4 39.86,5.54 41.47,3.94 47.3,3.94 47.58,4.21 49.55,4.21 50.1,3.66 50.1,2.54 51.37,1.27 54.23,1.27 54.36,1.4 54.36,2.58 Q4.3 54.92,2.66 55.49,3.23 55.49,3.97 55.56,4.04 56.52,4.04 56.52,7.05 56.2,7.37 55.08,7.37 55.05,7.39 R4.5
SCL_3V  (via drill 0.5)
  Top 0.254: MS1.18 MS1.18B 58.93,12.19 v58.99,12.13 | U$24.30 45.36,20.33 47.09,18.6 47.09,15.47 48.34,14.22 48.83,14.22 50.86,12.19 MS1.18 | IC4.4 51.82,12.25 MS1.18 | Q4.4 55.26,4.46 v55.69,4.89
  Top 0.305: R4.6 53.99,8.21 54.23,8.45 57.21,8.45 57.21,8.38 v57.47,8.13
  Bottom 0.254: v55.69,4.89 56.2,4.38 59.5,4.38 60.07,4.95 60.07,7.62 59.31,8.38 57.72,8.38 v57.47,8.13
  Bottom 0.305: v57.47,8.13 57.47,10.6 v58.99,12.13
SDA
  Top 0.254: I2C.3 41.86,5.38 42.85,4.39 46.37,4.39 50.06,8.09 52.04,8.09 52.29,7.83 R4.8 52.29,6.9 51.69,6.3 51.69,4.7 51.93,4.46 Q4.6
SDA_3V  (via drill 0.5)
  Top 0.254: MS1.17B 54.17,9.65 | 54.17,9.65 52.2,9.65 MS1.17 | U$24.29 44.86,20.19 46.63,18.41 46.63,15.15 46.7,15.09 v46.7,14.69 47.16,14.69 48.25,13.6 IC4.6 | v54.17,10.86 54.17,9.65 | Q4.1 51.16,4.28 v51.16,7.11
  Top 0.305: R4.7 53.19,8.66 52.2,9.65
  Bottom 0.254: 50.53,10.86 46.76,14.63 v46.7,14.69 | v54.17,10.86 50.53,10.86 | v46.7,14.69 | v51.16,7.11 50.72,7.56 50.72,10.67 50.53,10.86
SPKR+
  Top 0.305: U$13.1 22.91,42.22 22.29,41.59 17.46,41.59 15.62,43.43 15.62,44.7 | 15.62,44.7 15.62,47.12 15.24,47.5 IC2.1 | SJ2.1 14.73,44.7 15.62,44.7
SPKR-
  Top 0.305: U$13.2 23.94,41.02 23.88,41.09 12.26,41.09 7.36,45.98 SP1.+
  Top 0.406: SP1.+ 8.25,46.79 12.22,50.77 14.48,50.77 14.73,51.02 IC2.6
SPKR_EN  (via drill 0.5)
  Top 0.254: U$24.51 45.36,31.15 v45.21,31.3 | IC2.4 18,51.02 v18.16,51.18 | v7.49,42.8 10.92,39.37 15.37,39.37 v15.39,39.4
  Bottom 0.254: v45.21,31.3 44.3,30.38 41.76,30.38 40.04,32.1 40.04,34.98 37.17,37.85 35.41,37.85 34.82,38.44 34.82,39.06 31.7,42.18 24.3,42.18 20.22,38.1 17.14,38.1 15.85,39.4 v15.39,39.4 | v18.16,51.18 17.4,51.18 17.14,50.93 8.64,50.93 7.11,49.4 7.11,43.31 7.49,42.93 v7.49,42.8
SWCLK  (via drill 0.5)
  Top 0.254: U$24.57 42.36,30.48 42.35,30.49 v42.35,31.73 | v8.06,10.29 X2.4 | TP6.P$1 8.51,10.73 v8.06,10.29 | v8.06,10.29 8.06,17.89 11.64,21.46 v11.92,21.46
  Top 0.305: R15.2 22.1,11.98 20.74,13.34 v14.1,13.34
  Bottom 0.254: v42.35,31.73 42.23,31.86 42.23,34.78 32.74,44.27 26.99,44.27 25.54,45.72 24.38,45.72 22.92,44.26 16.12,44.26 12.24,40.39 12.24,23.31 11.92,22.99 v11.92,21.46
  Bottom 0.305: v14.1,13.34 11.11,13.34 v8.06,10.29
SWDIO  (via drill 0.5)
  Top 0.254: U$24.58 41.86,31.06 41.56,31.35 41.56,32.56 v41.44,32.68 | v12.76,22.67 11.81,22.67 6.79,17.65 6.79,10.79 | 6.79,10.79 X2.2 | 6.79,10.79 TP7.P$1
  Bottom 0.254: v41.44,32.68 41.44,34.91 32.57,43.77 26.84,43.77 25.4,45.21 24.64,45.21 23.2,43.77 16.28,43.77 12.76,40.26 v12.76,22.67
TFT_CS  (via drill 0.5)
  Top 0.254: U$24.10 38.1,24.71 37.67,24.71 37.64,24.74 v36.64,24.74
  Bottom 0.254: v36.64,24.74 36.57,24.68 34.78,24.68 33.25,23.16 31.11,23.16 29.04,25.23 LCD1.12
TFT_DC  (via drill 0.5)
  Top 0.254: U$24.6 37.08,26.65 36.99,26.73 36.71,27.01 v36.22,27.01
  Bottom 0.254: v36.22,27.01 35.01,28.22 29.19,28.22 28.18,29.23 LCD1.7
TFT_LITE  (via drill 0.5)
  Top 0.203: 23.32,35.3 23.55,35.3 24.03,34.82 24.03,34.14 24.88,33.29 Q3.1
  Top 0.254: 23.32,35.3 21.67,36.96 19.56,36.96 19.3,37.21 19.3,39.12 v18.86,39.56 | U$24.2 37.72,28.65 36.88,29.49 36.88,33.96 36.61,34.22 36.58,34.22 36.34,34.47 36.34,36.41 35.81,36.93 35.81,38.73 v35.75,38.8
  Top 0.305: Q3.1 26.44,33.29 R17.1
  Bottom 0.254: v35.75,38.8 31.88,42.67
  Bottom 0.305: 31.88,42.67 22.16,42.67 19.05,39.56 v18.86,39.56
TFT_MOSI  (via drill 0.5)
  Top 0.254: U$24.28 44.4,20.91 44.4,20 44.64,19.76 v44.64,19.18
  Bottom 0.254: v44.64,19.18 44.64,17.83 45,17.48 45,16.68 43.94,15.62 43.94,13.88 41.15,11.09 29.97,11.09 23.6,17.46 23.6,27.79 24.24,28.43 LCD1.8
TFT_RST  (via drill 0.5)
  Top 0.254: U$24.1 37.34,29.97 37.34,35.81 v37.12,35.81
  Bottom 0.254: 26.14,30.03 LCD1.6 | 25.95,29.84 21.79,29.84 20.83,30.8 20.83,36.7 24.64,40.51 30.16,40.51 30.67,40.01 31.93,40.01 35.74,36.2 36.74,36.2 v37.12,35.81
  Bottom 0.305: 25.95,29.84 26.14,30.03
TFT_SCK  (via drill 0.5)
  Top 0.254: v44.21,17.16 44.21,17.66 43.36,18.52 U$24.26
  Bottom 0.254: v44.21,17.16 44.35,17.02 43.46,16.13 43.46,14.11 40.89,11.54 30.16,11.54 24.05,17.65 24.05,26.91 24.77,27.63 LCD1.9
TX  (via drill 0.5)
  Top 0.254: 31.3,12.19 MS1.15B | MS1.15 31.3,12.19 | U$24.39 48.86,24.65 49.37,24.14 v49.45,24.14 | v31.43,13.53 31.3,13.4 31.3,12.19
  Bottom 0.254: v49.45,24.14 48.81,24.77 42.24,24.77 31.43,13.97 v31.43,13.53
V+  (via drill 0.5)
  Top 0.305: R1.5 46.58,35.53 46.58,36.4 47.47,37.28 U2.1 49.37,37.28 49.62,37.02 49.62,35.7 v49.7,35.62
  Top 0.406: Q2.3 45.91,43.51 45.04,44.39 44.9,44.39 | v38.1,47.62 40.57,47.62 42.67,45.53 C6.1 44.9,44.39 | v44.75,44.25 44.76,44.25 44.9,44.39 | v66.4,10.67 66.46,10.73 70.04,10.73 70.87,9.91 SJ1.1 | C15.1 16.19,52.01 IC2.5 16.19,50.27 16.8,49.66 v17.82,49.66
  Bottom 0.305: LED1.2
  Bottom 0.406: v38.1,47.62 38.1,47.75 37.21,47.75 31.5,53.47 23.75,53.47 19.94,49.66 v17.82,49.66 | v44.75,44.25 45.66,44.25 49.09,40.83 49.09,38.33 49.64,37.78 49.64,35.69 v49.7,35.62 49.15,35.07 49.15,33.53 51.82,30.86 51.82,30.23 60.02,22.02 60.02,19.19 60.15,19.19 66.48,12.86 66.48,10.58 | LED1.2 62.87,5.59 66.48,9.21 66.48,10.58 | LED1.2 62.08,5.03 60.73,3.68 53.34,3.68 LED2.2 53.34,4.08 52.95,3.68 46.53,3.68 LED3.2 43.71,4.7 36.78,4.7 LED4.2 34.98,4.7 28.05,4.7 LED5.2 | v66.4,10.67 66.48,10.58
VBAT
  Top 0.305: 44.07,36.39 44.07,33.43 44.45,33.05 46.46,33.05 R1.8
  Top 0.406: 44.07,36.39 C3.1 U3.3 43.24,39.49 44.4,40.66 Q1.3 46.24,40.66 47.9,42.31 X1.2 51.61,42.31 51.63,42.29 51.63,37.85 MS1.28 MS1.28B
VBUS  (via drill 0.5)
  Top 0.254: 44.51,50.67 44.5,50.67 44.06,50.22 44.06,49.24 X3.VBUS
  Top 0.305: D4.A 46.67,47.12 46.44,47.35 46.39,47.35 45.57,48.17 45.13,48.17 X3.VBUS
  Top 0.406: v49.91,47.12 D4.A | U3.4 43.47,41.66 45.8,41.66 Q1.1 46.8,43.62 v47.18,44.01 | R1.3 48.54,34.37 49,34.37 49.66,33.72 50.16,33.72 v50.16,33.78 51.44,32.51 MS1.26 MS1.26B | CHG.A 37.05,53.59 44.13,53.59 44.64,53.09 44.64,50.8 44.51,50.67
  Bottom 0.406: v49.91,47.12 49.85,47.12 49.85,43.94 | 49.85,43.94 49.85,38.48 50.61,37.72 50.61,34.42 50.16,33.97 v50.16,33.78 | v47.18,44.01 49.78,44.01 49.85,43.94
VCC  (via drill 0.5)
  Top 0.305: R4.1 52.29,6.19 52.69,6.58 54.48,6.58 54.89,6.17 R4.4 v55.68,6.48 v55.69,6.48 | 61.02,4.76 60.58,4.32 58.1,4.32 57.4,5.02 57.4,6.03 v57.39,6.02
  Top 0.406: NEOPIX.2 v24.64,3.87 | SENSE.2 61.02,4.76 v62.1,3.68 63.63,3.68 64.07,4.13 66.42,4.13 67.06,3.49 67.06,3.37 | I2C.2 43.86,9.79 43.5,10.16 38.67,10.16 38.16,9.65 38.16,4.51 38.97,3.7 v38.99,3.7 | 67.06,3.37 C10.1 | SJ1.2 70.04,4.25 69.15,3.37 67.06,3.37
  Bottom 0.305: v57.39,6.02 56.93,6.48 v55.69,6.48
  Bottom 0.406: v62.1,3.68 61.45,3.04 45.13,3.04 44.46,3.7 v38.99,3.7 38.82,3.87 v24.64,3.87
VDDCORE2
  Top 0.254: U$24.53 44.36,30.34 43.84,30.86 43.84,32.96 43.01,33.78 C19.1 43.01,35.33 C18.1